# Altium PCB PCB_PiHexaSub_2021-12-09.pcbdoc
Units mil, origin at the board's own origin, x right, y up, seen from the top; angles counter-clockwise.
Board outline 4947.01 x 2072.99 mil, 2 copper layers (Top Layer, Bottom Layer); 37 components, 43 nets, 131 pads, 8 vias.
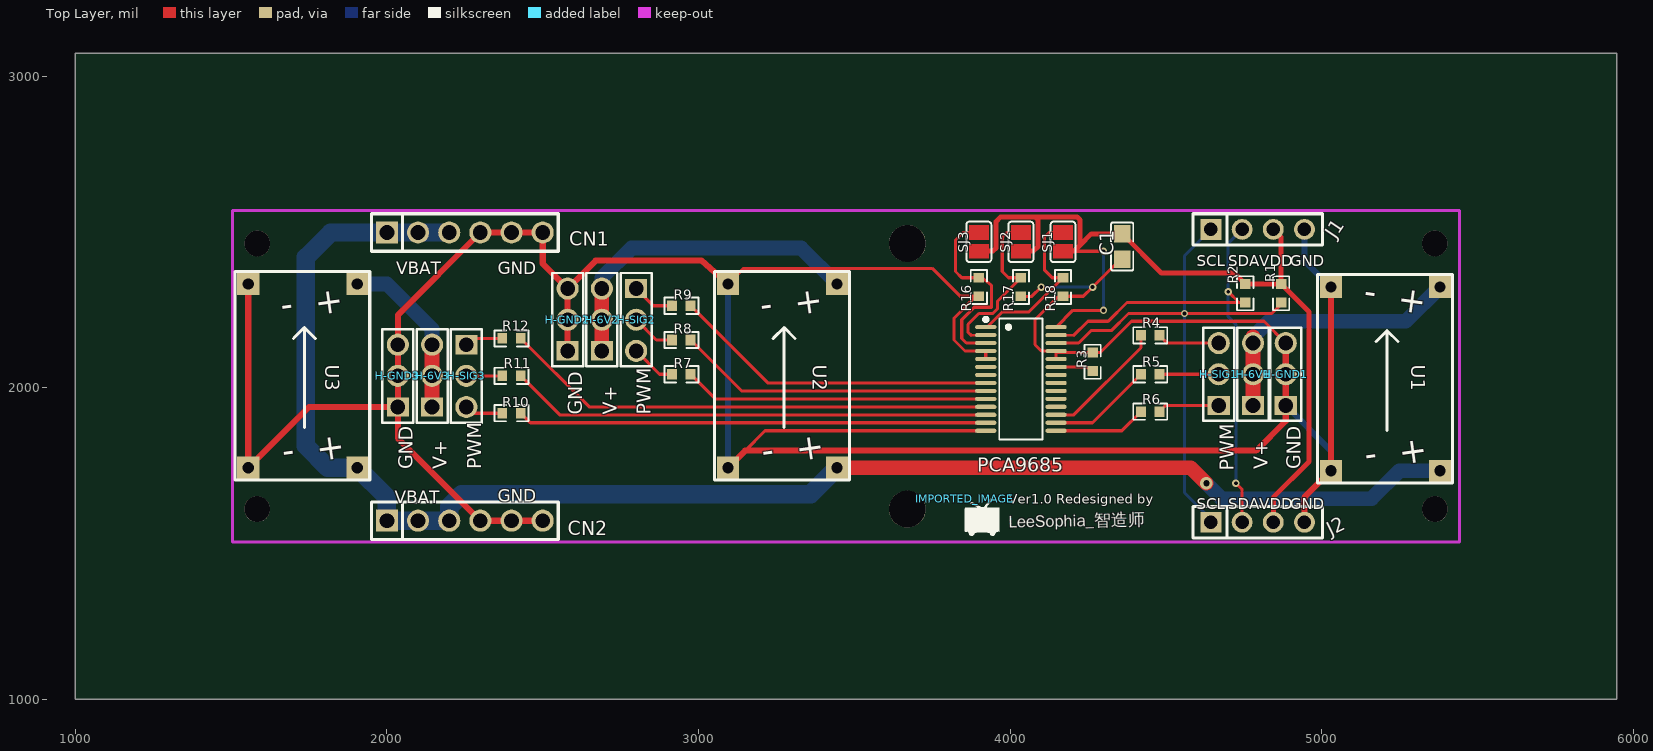
[diagram p0: Top Layer view]
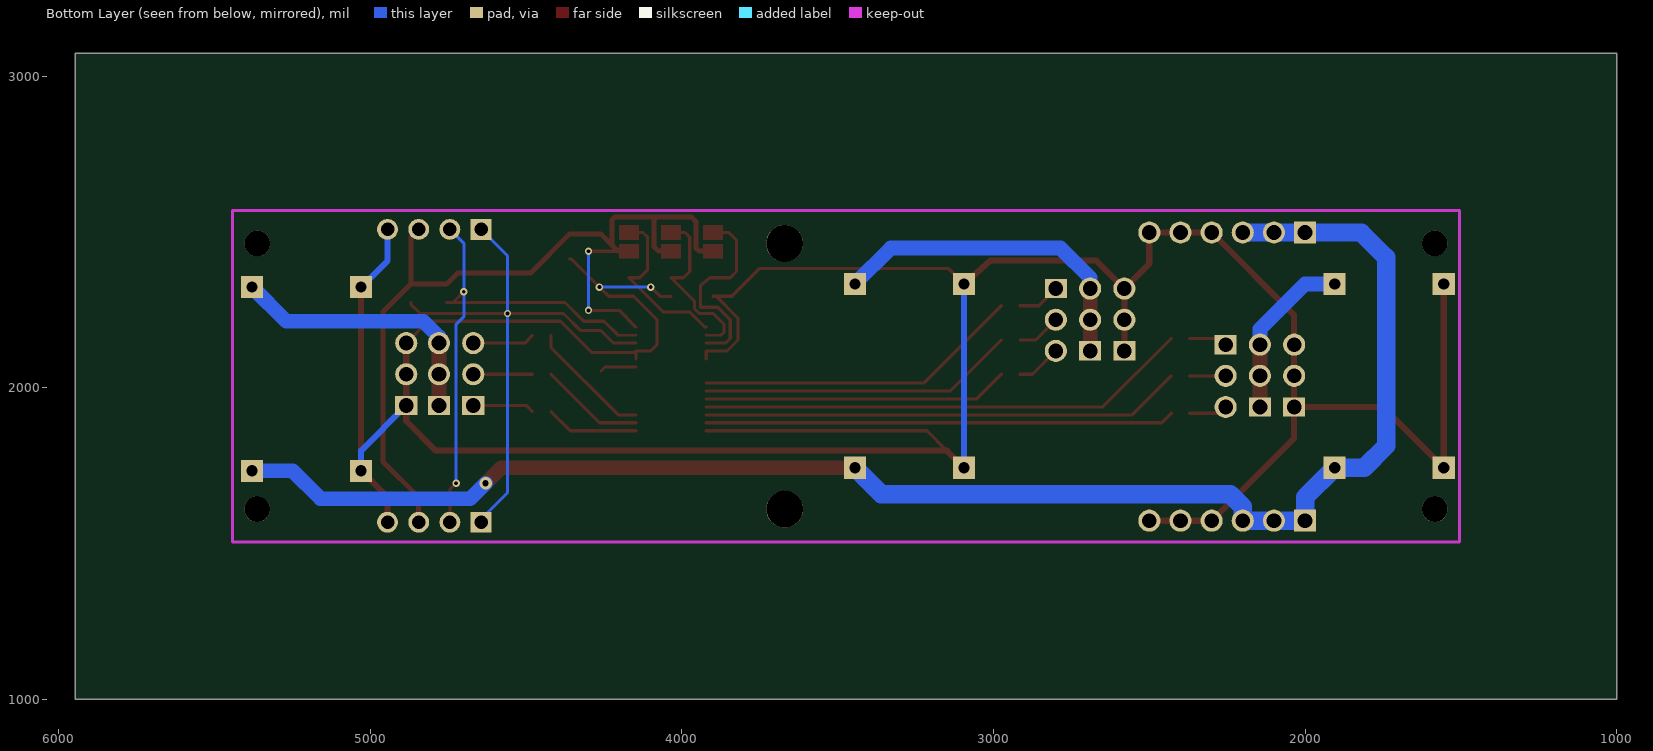
[diagram p1: Bottom Layer view, seen from below]

## Layer stack, top to bottom
Top Layer: signal copper (thickness not stored)
Dielectric: dielectric 12.6, FR-4, Dk 4.8
Bottom Layer: signal copper (thickness not stored)

## Board outline
5947.01,1000 1000,1000 1000,3072.99 5947.01,3072.99

## Components (designator, comment, footprint, x,y, rotation, side; value= is the part's Value field where it differs from the comment)
C1 "10uF" C0805 4360,2452.99 r90 top
CN1 "210S-1*6P L=11.6MMGold-plated black" HDR-TH_6P-P2.54-V_Z-211-0611-0021-001 2250,2497.99 r0 top
CN2 "210S-1*6P L=11.6MMGold-plated black" HDR-TH_6P-P2.54-V_Z-211-0611-0021-001 2250,1572.99 r0 top
H-6V1 "Header-Male-2.54_1x3" HDR-TH_3P-P2.54-V-M-1 4780,2042.99 r90 top
H-6V2 "Header-Male-2.54_1x3" HDR-TH_3P-P2.54-V-M-1 2690,2217.99 r90 top
H-6V3 "Header-Male-2.54_1x3" HDR-TH_3P-P2.54-V-M-1 2145,2037.99 r90 top
H-GND1 "Header-Male-2.54_1x3" HDR-TH_3P-P2.54-V-M-1 4885,2042.99 r90 top
H-GND2 "Header-Male-2.54_1x3" HDR-TH_3P-P2.54-V-M-1 2580,2217.99 r90 top
H-GND3 "Header-Male-2.54_1x3" HDR-TH_3P-P2.54-V-M-1 2035,2037.99 r90 top
H-SIG1 "Header-Male-2.54_1x3" HDR-TH_3P-P2.54-V-M-1 4670,2042.99 r90 top
H-SIG2 "Header-Male-2.54_1x3" HDR-TH_3P-P2.54-V-M-1 2800,2217.99 r270 top
H-SIG3 "Header-Male-2.54_1x3" HDR-TH_3P-P2.54-V-M-1 2255,2037.99 r270 top
IMPORTED_IMAGE "IMPORTED_IMAGE" IMPORTED_IMAGE 3855,1642.97 r0 top
J1 "Z-211-0411-0021-001" HDR-TH_4P-P2.54-V-M 4795,2507.99 r0 top
J2 "Z-211-0411-0021-001" HDR-TH_4P-P2.54-V-M 4795,1567.99 r0 top
PCA9685 "PCA9685PW/Q900,118" TSSOP-28_L9.7-W4.4-P0.65-LS6.4-BL 4035,2027.99 r270 top
R1 "10K" R0603 4870,2302.99 r270 top
R2 "10K" R0603 4755,2302.99 r270 top
R3 "10K" R0603 4265,2082.99 r270 top
R4 "200" R0603 4450,2167.99 r0 top
R5 "200" R0603 4450,2042.99 r0 top
R6 "200" R0603 4450,1922.99 r0 top
R7 "200" R0603 2945,2042.99 r0 top
R8 "200" R0603 2945,2152.99 r0 top
R9 "200" R0603 2945,2262.99 r0 top
R10 "200" R0603 2400,1917.99 r0 top
R11 "200" R0603 2400,2037.99 r0 top
R12 "200" R0603 2400,2157.99 r0 top
R16 "10K" R0603 3900,2322.99 r90 top
R17 "10K" R0603 4035,2322.99 r90 top
R18 "10K" R0603 4170,2322.99 r90 top
SJ1 "SJ" SJ 4170,2467.99 r90 top
SJ2 "SJ" SJ 4035,2467.99 r90 top
SJ3 "SJ" SJ 3900,2467.99 r90 top
U1 "MINI360 DCDC" MINI360 5420,2362.99 r270 top
U2 "MINI360 DCDC" MINI360 3485,2372.99 r270 top
U3 "MINI360 DCDC" MINI360 1945,2372.99 r270 top

## Footprints (in the part's own frame and the unit in brackets; to place one, negate y for a bottom-side part, rotate by r counter-clockwise, add the part's x,y. Pads: shape width x height; smd on the part's side, far side on the other; paste and mask are expansions set on the pad)
C0805 [mm]
  rect 1.41x1.35 smd: 1(-1.03,0) 2(1.03,0)
  silkscreen extent -1.96,-0.9 1.96,0.9
HDR-TH_3P-P2.54-V-M-1 [mm]
  rect 1.575x1.8 hole 1.2: 1(-2.54,0)
  round 1.8 hole 1.2: 2(0,0) 3(2.54,0)
  silkscreen extent -3.81,-1.27 3.81,1.27
HDR-TH_4P-P2.54-V-M [mm]
  rect 1.7x1.7 hole 1.1: 1(-3.81,0)
  round 1.7 hole 1.1: 2(-1.27,0) 3(1.27,0) 4(3.81,0)
  silkscreen extent -5.29,-1.27 5.29,1.27
HDR-TH_6P-P2.54-V_Z-211-0611-0021-001 [mm]
  rect 1.8x1.8 hole 1.2: 1(-6.35,0)
  round 1.8 hole 1.2: 2(-3.81,0) 3(-1.27,0) 4(1.27,0) 5(3.81,0) 6(6.35,0)
  silkscreen extent -7.62,-1.52 7.62,1.52
IMPORTED_IMAGE [mil]
  silkscreen extent 0,-118 110,0
MINI360 [mil]
  rect 70.87x70.87 hole 36: 1(40,-40) 2(40,-390) 3(630,-40) 4(630,-390)
  silkscreen extent 0,-433 669,0
R0603 [mil]
  rect 31.75x34.02 smd: 1(-29.65,0) 2(29.66,0)
  silkscreen extent -55,-26 55,26
SJ [mil]
  round 0 smd: 1(-30,0) 2(30,0)
  Top Layer region: -53,31.5 -7,31.5 -7,-31.5 -53,-31.5
  Top Layer region: 7,31.5 53,31.5 53,-31.5 7,-31.5
  silkscreen extent -65,-40 65,40
TSSOP-28_L9.7-W4.4-P0.65-LS6.4-BL [mm]
  oval 0.343x1.731 smd: 1(-4.225,-2.866) 2(-3.575,-2.866) 3(-2.925,-2.866) 4(-2.275,-2.866) 5(-1.625,-2.866) 6(-0.975,-2.866) 7(-0.325,-2.866) 8(0.325,-2.866) 9(0.975,-2.866) 10(1.625,-2.866) 11(2.275,-2.866) 12(2.925,-2.866) 13(3.575,-2.866) 14(4.225,-2.866) 15(4.225,2.866) 16(3.575,2.866) 17(2.925,2.866) 18(2.275,2.866) 19(1.625,2.866) 20(0.975,2.866) 21(0.325,2.866) 22(-0.325,2.866) 23(-0.975,2.866) 24(-1.625,2.866) 25(-2.275,2.866) 26(-2.925,2.866) 27(-3.575,2.866) 28(-4.225,2.866)
  silkscreen extent -5,-3.02 4.93,1.77

## Free pads (board coordinates)
  round 82.68 hole 82.68 unplated: ""(1583.74,1610.12) ""(1583.74,2462.87) ""(5363.27,1610.12) ""(5363.27,2462.87)
  round 118.11 hole 118.11 unplated: ""(3670.35,1610.12) ""(3670.35,2462.87)

## Via types
v1: diameter 24, hole 12, Top Layer to Bottom Layer, 7 vias
v2: diameter 39.37, hole 19.69, Top Layer to Bottom Layer, 1 vias

## Nets (pads, with @x,y where several pads share a name; then routed paths per layer and width w, separated by ;. In a path a pad name is that pad's centre, name@x,y a point inside that pad or via, vN(x,y) a via of type N, cw(c..) or ccw(c..) an arc to the next point about the centre after c; other vN are vias at no path point)
GND: C1.1 CN1.4 CN1.5 CN1.6 CN2.4 CN2.5 CN2.6 H-GND1.1 H-GND1.2 H-GND1.3 H-GND2.1 H-GND2.2 H-GND2.3 H-GND3.1 H-GND3.2 H-GND3.3 J1.4 J2.4 PCA9685.4 PCA9685.5 PCA9685.14 PCA9685.24 PCA9685.25 R3.1 R16.1 R17.1 R18.1 U1.2 U1.4 U2.2 U2.4 U3.2 U3.4 | length 11234.3
  Top Layer w10: U2.2 3145,2382.99 3750,2382.99 3839.7,2293.29 R16.1 3890.3,2293.29 3820,2222.99 3820,2152.99 3855.4,2117.59 PCA9685.4 ; 3150,1797.99 3213.66,1861.65 PCA9685.14 ; PCA9685.5 PCA9685.4 ; R17.1 4070,2292.99 v1(4100,2322.99) ; PCA9685.24 PCA9685.25 ; R3.1@4260,2112.65 4152.74,2112.65 PCA9685.25 ; R3.1@4265,2112.65 4289.66,2112.65 4390,2212.99 4815,2212.99 H-GND1.3 ; C1.1 4354.45,2412.44 v1(4265,2322.99) 4235.34,2293.33 R18.1 4155.34,2293.33 4080,2217.99 4080,2137.99 4100.43,2117.56 PCA9685.25
  Top Layer w19.68: U3.2 U3.4 1750,1937.99 H-GND3.1 ; CN2.6 CN2.5 CN2.4 2035,1837.99 H-GND3.1 ; H-GND2.1 H-GND2.2 H-GND2.3 ; U2.4 3150,1797.99 4790,1797.99 4885,1892.99 H-GND1.1 ; U2.2 3010,2407.99 2670,2407.99 H-GND2.3 ; H-GND1.1@4885,1962.99 4885,2062.99 H-GND1.3@4885,2162.99 ; J2.4 4945,1647.99 U1.4 U1.2 ; H-GND3.1 H-GND3.2 H-GND3.3 2035,2232.99 CN1.4 CN1.5 CN1.6 2500,2397.99 H-GND2.3
  Bottom Layer w10: v1(4100,2322.99) v1(4265,2322.99)
  Bottom Layer w19.68: U2.4 U2.2 ; H-GND1.1 5030,1797.99 U1.4 ; J1.4 4945,2407.99 U1.2
H-SIG1_1: H-SIG1.1 R6.2 | length 198.6
  Top Layer w10: R6.2 4499.66,1942.99 H-SIG1.1
H-SIG1_2: H-SIG1.2 R5.2 | length 190.3
  Top Layer w10: R5.2 H-SIG1.2
H-SIG1_3: H-SIG1.3 R4.2 | length 200.7
  Top Layer w10: R4.2 4504.66,2142.99 H-SIG1.3
H-SIG2_2: H-SIG2.2 R8.1 | length 142.3
  Top Layer w10: H-SIG2.2 2865,2152.99 R8.1
H-SIG2_3: H-SIG2.3 R7.1 | length 146.4
  Top Layer w10: H-SIG2.3 2875,2042.99 R7.1
H-SIG3_1: H-SIG3.1 R12.1 | length 123.6
  Top Layer w10: H-SIG3.1 2275,2157.99 R12.1
H-SIG3_2: H-SIG3.2 R11.1 | length 115.3
  Top Layer w10: H-SIG3.2 R11.1
H-SIG3_3: H-SIG3.3 R10.1 | length 123.6
  Top Layer w10: H-SIG3.3 2275,1917.99 R10.1
PCA9685_1: PCA9685.1 R18.2 SJ1.2 | length 555.1
  Top Layer w10: PCA9685.1 3926.3,2194.29 3975,2242.99 4060.3,2242.99 4170,2352.69 4135.3,2352.69 4110,2377.99 4110,2482.99 4125,2497.99 SJ1.2
PCA9685_2: PCA9685.2 R17.2 SJ2.2 | length 577.4
  Top Layer w10: PCA9685.2 3875,2167.99 3865,2177.99 3865,2202.99 3900,2237.99 3945,2237.99 3960,2252.99 3960,2277.69 4035,2352.69 3995.3,2352.69 3975,2372.99 3975,2482.99 3990,2497.99 SJ2.2
PCA9685_3: PCA9685.3 R16.2 SJ3.2 | length 642.6
  Top Layer w10: SJ3.2 3850,2497.99 3825,2472.99 3825,2372.99 3845.3,2352.69 3900,2352.69 3910.3,2352.69 3940,2327.99 3940,2257.99 3885,2257.99 3845,2217.99 3845,2157.99 3859.8,2143.19 PCA9685.3@3922.2,2143.19
PCA9685_6: PCA9685.6
PCA9685_7: PCA9685.7
PCA9685_8: PCA9685.8 R9.2 | length 1050.2
  Top Layer w10: R9.2 3222.46,2015.19 PCA9685.8
PCA9685_9: PCA9685.9 R8.2 | length 1015.2
  Top Layer w10: R8.2 3138.05,1989.6 PCA9685.9
PCA9685_10: PCA9685.10 R7.2 | length 980.2
  Top Layer w10: R7.2 3053.64,1964.01 PCA9685.10
PCA9685_11: PCA9685.11 R12.2 | length 1583.5
  Top Layer w10: R12.2 2649.23,1938.42 PCA9685.11
PCA9685_12: PCA9685.12 R11.2 | length 1544.4
  Top Layer w10: R11.2 2554.82,1912.83 PCA9685.12
PCA9685_13: PCA9685.13 R10.2 | length 1505.3
  Top Layer w10: R10.2 2460.41,1887.24 PCA9685.13
PCA9685_15: PCA9685.15 R6.1 | length 297.9
  Top Layer w10: PCA9685.15 4359,1861.65 R6.1
PCA9685_16: PCA9685.16 R5.1 | length 337
  Top Layer w10: PCA9685.16 4264.59,1887.24 R5.1
PCA9685_17: PCA9685.17 R4.1 | length 401.4
  Top Layer w10: PCA9685.17 4204.84,1912.83 4420.34,2128.33 R4.1
PCA9685_18: PCA9685.18
PCA9685_19: PCA9685.19
PCA9685_20: PCA9685.20
PCA9685_21: PCA9685.21
PCA9685_22: PCA9685.22
PCA9685_23: PCA9685.23 R3.2 | length 117.6
  Top Layer w10: PCA9685.23 4246.95,2066.38 R3.2@4260,2053.33
PCA9685_26: J1.1 J2.1 PCA9685.26 R1.2 | length 1789.6
  Top Layer w10: PCA9685.26@4147.8,2143.19 4220.2,2143.19 4260,2182.99 4325,2182.99 4380,2237.99 4840,2237.99 4870,2267.99 R1.2
  Bottom Layer w10: J2.1 4645,1577.99 4560,1662.99 v1(4560,2237.99) 4560,2422.99 J1.1
PCA9685_27: J1.2 J2.2 PCA9685.27 R2.2 | length 1697.5
  Top Layer w10: PCA9685.27 4205,2167.99 4250,2212.99 4315,2212.99 4375.3,2273.29 R2.2 ; v1(4700,2307.99) 4734.66,2273.33 R2.2 ; v1(4725,1692.99) 4745,1672.99 J2.2
  Bottom Layer w10: v1(4725,1692.99) 4725,2202.99 4700,2227.99 v1(4700,2307.99) 4700,2462.99 J1.2
R9_1: H-SIG2.1 R9.1 | length 138.1
  Top Layer w10: H-SIG2.1 2855,2262.99 R9.1
S$7: 
S$9: 
S$11: 
S$13: 
S$62: 
S$64: 
U1_1: H-6V1.1 H-6V1.2 H-6V1.3 U1.1 | length 886.3
  Top Layer w47.24: H-6V1.1@4780,1962.99 4780,2062.99 H-6V1.3@4780,2162.99
  Bottom Layer w47.24: H-6V1.3 4780,2162.99 4830,2212.99 5270,2212.99 U1.1
U2_1: H-6V2.1 H-6V2.2 H-6V2.3 U2.1 | length 1077
  Top Layer w47.24: H-6V2.1 H-6V2.2 H-6V2.3
  Bottom Layer w47.24: H-6V2.3 2690,2352.99 2785,2447.99 3330,2447.99 U2.1
U2_3: CN1.1 CN1.2 CN1.3 CN2.1 CN2.2 CN2.3 U1.3 U2.3 U3.3 | length 5057
  Top Layer w47.24: U2.3 4580,1742.99 v2(4630,1692.99)
  Bottom Layer w47.24: v2(4630,1692.99) 4680,1642.99 5160,1642.99 5250,1732.99 U1.3
  Bottom Layer w59.05: CN1.3 CN1.2 CN1.1 1820,2497.99 1740,2417.99 1740,1812.99 1810,1742.99 U3.3 2000,1647.99 CN2.1 CN2.2 CN2.3 2200,1617.99 2240,1657.99 3360,1657.99 U2.3
U3_1: H-6V3.1 H-6V3.2 H-6V3.3 U3.1 | length 550.1
  Top Layer w47.24: H-6V3.1 H-6V3.2 H-6V3.3
  Bottom Layer w47.24: U3.1 2000,2332.99 2145,2187.99 H-6V3.3
VDD: C1.2 J1.3 J2.3 PCA9685.28 R1.1 R2.1 SJ1.1 SJ2.1 SJ3.1 | length 2949.3
  Top Layer w10: PCA9685.28 4201.49,2247.99 v1(4300,2247.99) ; 4205,2437.99 v1(4300,2437.99)
  Top Layer w15.75: SJ3.1 3945,2437.99 3955,2447.99 3955,2532.99 3970,2547.99 4080,2547.99 ; SJ2.1 4075,2437.99 4090,2452.99 4090,2537.99 4080,2547.99 ; SJ1.1 4205,2437.99 4225,2457.99 ; C1.2 4485.5,2367.99 4720,2367.99 R2.1@4755,2332.69 ; C1.2 4260.55,2493.54 4225,2457.99 ; R2.1@4755,2332.65 4870,2332.65 4870,2482.99 J1.3 ; J2.3 4845,1647.99 4960,1762.99 4960,2242.69 R1.1@4870,2332.69 ; 4080,2547.99 4215,2547.99 4225,2537.99 4225,2457.99
  Bottom Layer w10: v1(4300,2247.99) v1(4300,2437.99)

## Silkscreen, mask and mechanical layers (free items; w line width, h text height)
Top Overlay:
  text "SCL" at 4600,2390.28 h35.43
  text "SDA" at 4700,2390.28 h35.43
  text "VDD" at 4800,2390.28 h35.43
  text "GND" at 4900,2390.28 h35.43
  text "VBAT" at 2030,2363.31 h39.37
  text "GND" at 2355,2363.31 h39.37
  text "GND" at 2627.5,1912.99 h45 r90
  text "V+" at 2737.5,1912.99 h45 r90
  text "PWM" at 2847.5,1912.99 h45 r90
  text "GND" at 2082.5,1737.99 h45 r90
  text "V+" at 2192.5,1737.99 h45 r90
  text "PWM" at 2302.5,1737.99 h45 r90
  text "V+" at 4827.5,1737.99 h45 r90
  text "GND" at 4932.5,1737.99 h45 r90
  text "PWM" at 4717.5,1732.99 h45 r90
  text "GND" at 2356.36,1633.31 h39.37
  text "VBAT" at 2025,1628.31 h39.37
  text "Ver1.0 Redesigned by" at 3995.08,1616.63 h53.15
  text "SCL" at 4600,1610.28 h35.43
  text "SDA" at 4700,1610.28 h35.43
  text "VDD" at 4800,1610.28 h35.43
  text "GND" at 4900,1610.28 h35.43
  text "LeeSophia_智造师" at 3995.08,1536.63 h68.9 r1

## Text inside footprints (layer, text, board x,y; h text height)
U1: Top Overlay "+  -" at 5340.57,2304.9 h80 r172; Top Overlay "+  -" at 5334.43,1834.9 h80 r188
U2: Top Overlay "+  -" at 3394.43,2314.9 h80 r188; Top Overlay "+  -" at 3399.43,1844.9 h80 r188
U3: Top Overlay "+  -" at 1854.43,2314.9 h80 r188; Top Overlay "+  -" at 1859.43,1844.9 h80 r188